# Altium PCB BlackBox-LORA.PcbDoc
Units mil, origin at the board's own origin, x right, y up, seen from the top; angles counter-clockwise.
Board outline 4245 x 1870 mil, 2 copper layers (Top Layer, Bottom Layer); 6 components, 16 nets, 106 pads, 4 vias.
Unrouted connection lines stored in the file: 5.
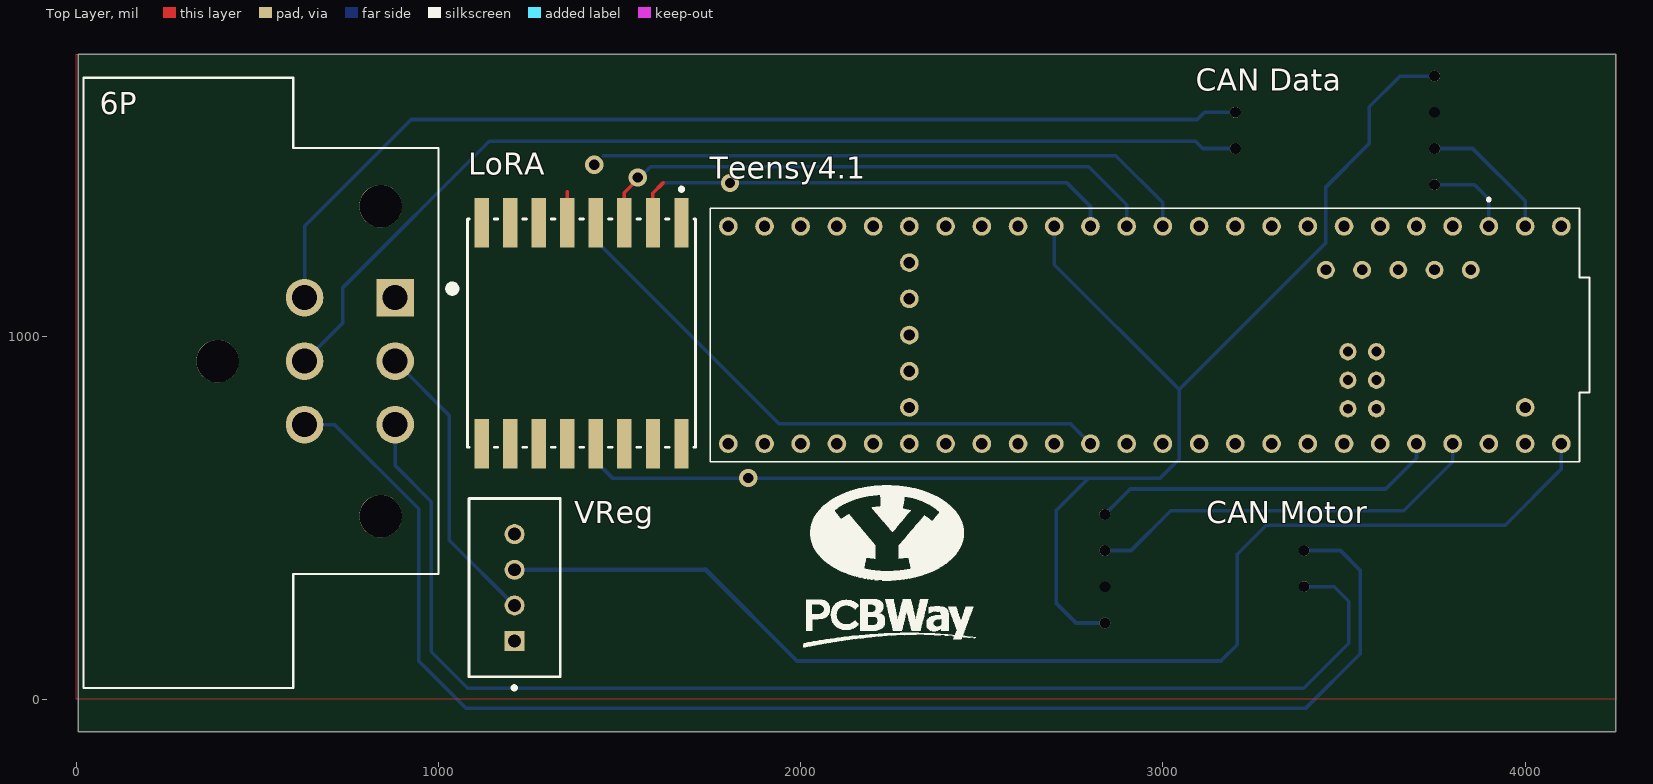
[diagram p0: Top Layer view]
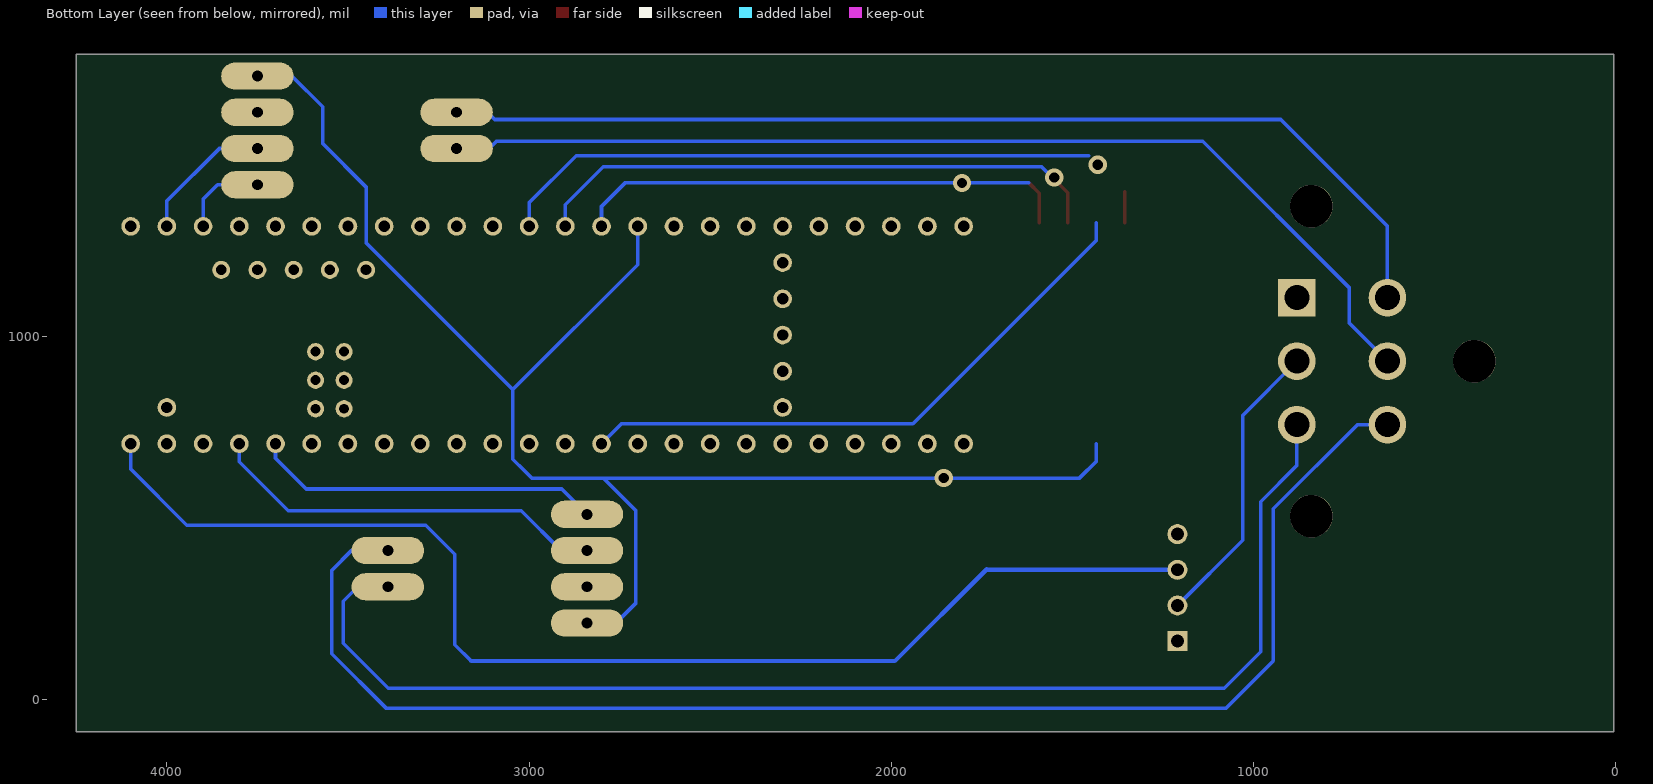
[diagram p1: Bottom Layer view, seen from below]
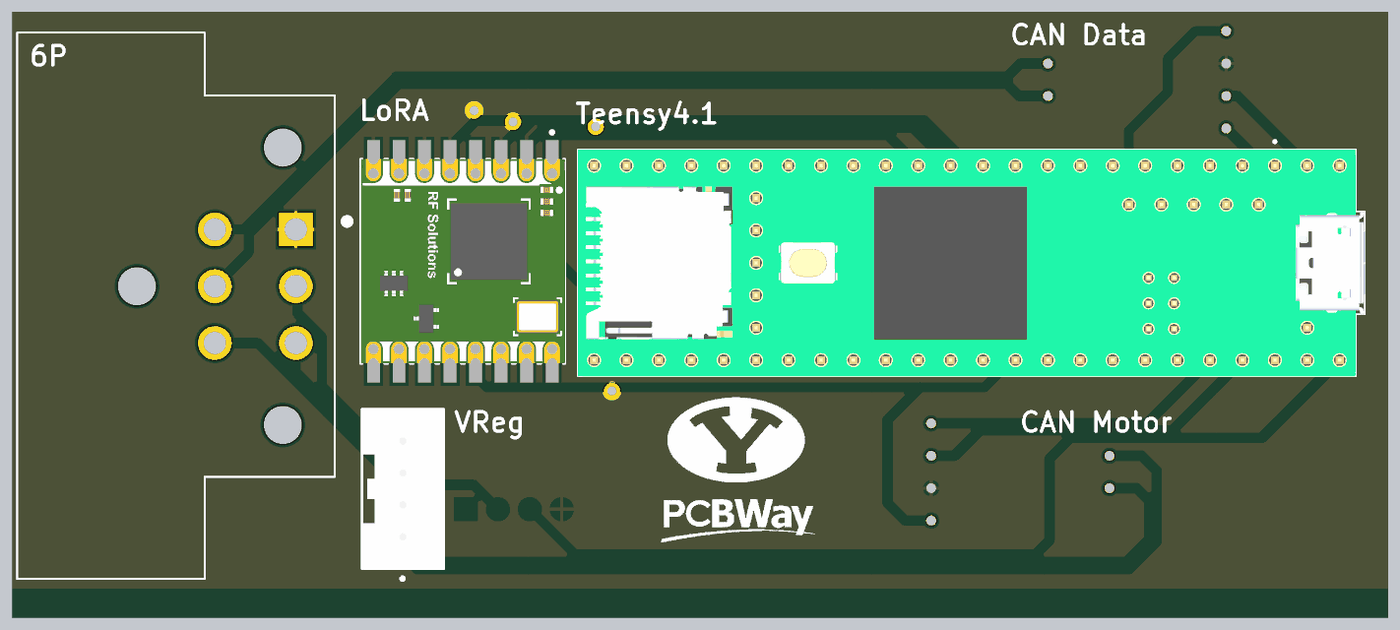
[diagram p2: 3D render of the assembled board from above, using the file's embedded part models]

## Layer stack, top to bottom
Top Solder: solder mask 0.4, Solder Resist, Dk 3.5
Top Layer: signal copper 1.4
Dielectric 1: dielectric 12.6, FR-4, Dk 4.8
Bottom Layer: signal copper 1.4
Bottom Solder: solder mask 0.4, Solder Resist, Dk 3.5

## Board outline
5,-90 4250,-90 4250,1780 5,1780

## Design rules (kind name [scope] priority, off if disabled: settings)
Clearance [All] p1: gap=10 ignorepadtopadclearanceinfootprint=FALSE
HoleSize [All] p1: absolutevalues=TRUE maxlimit=200 minlimit=1 maxpercent=80.000 minpercent=20.000
PolygonConnect [All] p1: connectstyle=Relief reliefconductorwidth=10 reliefentries=4 polygonreliefangle="90 Angle" airgapwidth=10
RoutingVias [All] p1: holewidth=28 width=50 viastyle="Through Hole" minholewidth=28 minwidth=50 maxholewidth=28 maxwidth=50
SolderMaskExpansion [All] p1: expansion=4 istentingtop=FALSE
SupplyNets "Schematic Supply Nets" [InNet('GND')] p1: voltage=0.000
Width [All] p1: maxlimit=20 minlimit=10 preferedwidth=12 minimp=50.000000 maximp=50.000000 favimp=50.000000
29 further rules are at their usual default settings.

## Components (designator, comment, footprint, x,y, rotation, side; value= is the part's Value field where it differs from the comment)
6P "DT13-6P" TE_DT13-6P 630.16,932.95 r0 top
"CAN Data" "CAN Module" "CAN Module-Footprint-1" 3750,1720 r180 top
"CAN Motor" "CAN Module" "CAN Module-Footprint-1" 2840,210 r0 top
LoRA "RFM95W-868S2" FP-RFM95W-868S2-MFG 1395,1010 r270 top
Teensy4.1 "DEV-16771" MODULE_DEV-16771 2950,1005 r180 top
VReg "B04B-XASK-1(LF)(SN)" FP-B04B-XASK-1_LF_SN-MFG 1210,307.64 r270 top

## Footprints (in the part's own frame and the unit in brackets; to place one, negate y for a bottom-side part, rotate by r counter-clockwise, add the part's x,y. Pads: shape width x height; smd on the part's side, far side on the other; paste and mask are expansions set on the pad)
"CAN Module-Footprint-1" [mil]
  round 30 / inner round 60 / far side oval 200x75 hole 30: 1(0,300) 2(0,200) 4(0,0) 5(550,200) 6(550,100)
  round 0 / inner round 60 / far side oval 200x75 hole 30: 3(0,100)
FP-B04B-XASK-1_LF_SN-MFG [mm]
  rect 1.4x1.4 hole 0.9 paste-2539.97 mask+0: 1(3.75,0)
  round 1.4 hole 0.9 paste-2539.97 mask+0: 2(1.25,0) 3(-1.25,0) 4(-3.75,0)
  silkscreen extent -6.25,-3.2 7.15,3.2, body extent -6.35,-3.3 6.35,3.3, height 0.25
FP-RFM95W-868S2-MFG [mm]
  rect 3.5x1 smd paste+0 mask+0: 1(-7.75,7) 2(-7.75,5) 3(-7.75,3) 4(-7.75,1) 5(-7.75,-1) 6(-7.75,-3) 7(-7.75,-5) 8(-7.75,-7) 9(7.75,-7) 10(7.75,-5) 11(7.75,-3) 12(7.75,-1) 13(7.75,1) 14(7.75,3) 15(7.75,5) 16(7.75,7)
  silkscreen extent -10.22,-8 8,8, body extent -9.6,-8.1 9.6,8.1, height 0.25
MODULE_DEV-16771 [mm]
  round 1.308 hole 0.8: 0(-26.67,-7.62) 1(-24.13,-7.62) 2(-21.59,-7.62) 3(-19.05,-7.62) 3.3V_1(6.35,-7.62) 3.3V_2(-24.13,7.62) 3.3V_3(16.51,-2.54) 4(-16.51,-7.62) 5(-13.97,-7.62) 6(-11.43,-7.62) 7(-8.89,-7.62) 8(-6.35,-7.62) 9(-3.81,-7.62) 10(-1.27,-7.62) 11(1.27,-7.62) 12(3.81,-7.62) 13(3.81,7.62) 14(1.27,7.62) 15(-1.27,7.62) 16(-3.81,7.62) 17(-6.35,7.62) 18(-8.89,7.62) 19(-11.43,7.62) 20(-13.97,7.62) 21(-16.51,7.62) 22(-19.05,7.62) 23(-21.59,7.62) 24(8.89,-7.62) 25(11.43,-7.62) 26(13.97,-7.62) 27(16.51,-7.62) 28(19.05,-7.62) 29(21.59,-7.62) 30(24.13,-7.62) 31(26.67,-7.62) 32(29.21,-7.62) 33(29.21,7.62) 34(26.67,7.62) 35(24.13,7.62) 36(21.59,7.62) 37(19.05,7.62) 38(16.51,7.62) 39(13.97,7.62) 40(11.43,7.62) 41(8.89,7.62) GND1(-29.21,-7.62) GND2(6.35,7.62) GND3(-26.67,7.62) GND4(16.51,0) ON/OFF(16.51,5.08) PROGRAM(16.51,2.54) VBAT(16.51,-5.08) VIN(-29.21,7.62) VUSB(-26.67,5.08)
  round 1.258 hole 0.75: 5V(-22.86,-4.57) D+(-17.78,-4.57) D-(-20.32,-4.57) USB_GND1(-15.24,-4.57) USB_GND2(-12.7,-4.57)
  round 1.208 hole 0.7: GND5(-14.24,3.17) LED(-16.24,3.17) R+(-16.24,5.17) R-(-14.24,5.17) T+(-14.24,1.17) T-(-16.24,1.17)
  silkscreen extent -31.18,-9.6 30.48,8.89, body extent -31.18,-8.89 30.48,8.89, height 7.15
TE_DT13-6P [mm]
  rect 2.64x2.64 hole 1.76: 1(6.35,4.45)
  round 2.64 hole 1.76: 2(6.35,0) 3(6.35,-4.45) 4(0,-4.45) 5(0,0) 6(0,4.45)
  round 2.99 hole 2.99 unplated: ""(-6.1,0) ""(5.33,-10.87) ""(5.33,10.87)
  silkscreen extent -15.5,-22.93 10.61,19.87

## Part data
6P: "DT13 Series, 4.44mm Pitch 6 Way 2 Row Right Angle PCB Header, Solder Termination", Package=None, Availability=Unavailable, DigiKey-Purchase-URL=https://snapeda.com/shop?store=DigiKey&id=1897474, EU_RoHS_Compliance=Compliant, MF="TE Connectivity", MP=DT13-6P, Price=None, SnapEDA_Link=https://www.snapeda.com/parts/DT13-6P/TE%20Connectivity%20Deutsch%20Connectors/view-part/1897474/?ref=snap
"CAN Data" "CAN Motor": library part CMP-00030-00003-1, "CAN waveshare"
LoRA: library part CMP-204316-000001-1, "RX TXRX MODULE ISM < 1GHZ SMD", Case/Package=SMD/SMT, Current - Receiving=12.1mA, Current - Transmitting=120mA, Frequency=868MHz, Max Operating Temperature=70°C, Min Operating Temperature=-20°C, Data Rate=300Kbps, Interface=SPI, Mount="Surface Mount", Packaging=Bulk, Sensitivity=-123dBm
Teensy4.1: "RT1062 Teensy 4.1 series ARM® Cortex®-M7 MPU Embedded Evaluation Board", Package=None, Check_prices=https://www.snapeda.com/parts/DEV-16771/SparkFun+Electronics/view-part/?ref=eda, MF="SparkFun Electronics", MP=DEV-16771, SnapEDA_Link=https://www.snapeda.com/parts/DEV-16771/SparkFun+Electronics/view-part/?ref=snap
VReg: library part CMP-17439-000018-1, "CONN HEADER VERT 4POS 2.5MM", Current Rating=3A, Manufacturer=JST, Temperature="-25°C to +85°C", Temperature Range High=+85°C, Temperature Range Low=-25°C, Voltage Rating=250V, Automotive=No, Category=Conn, ComponentLink2Description=Datasheet, ComponentLink2URL=http://www.jst-mfg.com/product/pdf/eng/eXA1.pdf, Conn Gender=Male, Conn Orientation=Straight, Contact Material=Tin,Copper, Device Class L1=Connectors, Device Class L2="Headers and Wire Housings", Device Class L3=unset, Digikey Description="CONN HEADER VERT 4POS 2.5MM", Height=8.8mm, Lead Free=Yes, Manufacturer Part Number=B04B-XASK-1(LF)(SN), Number of Contacts=4, Number of Rows=1, Octopart=https://octopart.com/b04b-xask-1%28lf%29%28sn%29-jst-3990149, Package=B04B-XASK-1(LF)(SN), Pitch=2.5mm, RoHS=TRUE

## Via types
v1: diameter 50, hole 28, Top Layer to Bottom Layer, 4 vias

## Nets (pads, with @x,y where several pads share a name; then routed paths per layer and width w, separated by ;. In a path a pad name is that pad's centre, name@x,y a point inside that pad or via, vN(x,y) a via of type N, cw(c..) or ccw(c..) an arc to the next point about the centre after c; other vN are vias at no path point)
3VCC: "CAN Data.4" "CAN Motor.4" LoRA.13 Teensy4.1.3.3V_1 | length 4238.9
  Bottom Layer w10: 1434.37,704.88 1434.37,655.67 1480.04,610 2795,610 ; Teensy4.1.3.3V_1 2700,1199.36 3044.68,854.68 ; 2840,210 2760,210 2705,265 2705,520 2795,610 ; 3750,1720 3655,1720 3570,1635 3570,1533.81 3450,1413.81 3450,1260 3044.68,854.68 ; 2795,610 2992.63,610 3013.61,630.98 3044.68,662.05 3044.68,854.68
  other v1: 1855,610
GND: 6P.1 "CAN Data.3" "CAN Motor.3" LoRA.6 LoRA.8 Teensy4.1.GND1 VReg.4
Net6P_2: 6P.2 VReg.2 | length 811.2
  Bottom Layer w10: 6P.2 1030,783.11 1030,438.43 VReg.2
Net6P_3: 6P.3 "CAN Motor.6" | length 3550.2
  Bottom Layer w10: 6P.3 880.16,644.84 980,545 980,130.3 1080.3,30 3388.89,30 3513,154.11 3513,270 3473,310 3390,310
Net6P_4: 6P.4 "CAN Motor.5" | length 3954.8
  Bottom Layer w10: 6P.4 712.24,757.76 945,525 945,105.3 1075.3,-25 3395,-25 3545,125 3545,355 3490,410 3390,410
Net6P_5: 6P.5 "CAN Data.5" | length 2886.5
  Bottom Layer w10: 6P.5 735.05,1037.85 735.05,1135.05 1140,1540 3090,1540 3110,1520 3200,1520
Net6P_6: 6P.6 "CAN Data.6" | length 2897.3
  Bottom Layer w10: 6P.6 630.16,1305.16 925,1600 3095,1600 3115,1620 3200,1620
"NetCAN Data_1": "CAN Data.1" Teensy4.1.1 | length 241.6
  Bottom Layer w10: 3750,1420 3860,1420 3900,1380 Teensy4.1.1
"NetCAN Data_2": "CAN Data.2" Teensy4.1.0 | length 380.1
  Bottom Layer w10: 3750,1520 3855,1520 4000,1375 Teensy4.1.0
"NetCAN Motor_1": "CAN Motor.1" Teensy4.1.22 | length 964.2
  Bottom Layer w10: 2840,510 2910,580 3615,580 3700,665 Teensy4.1.22
"NetCAN Motor_2": "CAN Motor.2" Teensy4.1.23 | length 1111.5
  Bottom Layer w10: 2840,410 2912,410 3022,520 3665,520 3800,655 Teensy4.1.23
NetLoRA_2: LoRA.2 Teensy4.1.12 | length 1383.5
  Top Layer w10: LoRA.2 1591.85,1396.85 1620,1425
  Bottom Layer w10: 1620,1425 2735,1425 2800,1360 Teensy4.1.12
  other v1: 1805,1425
NetLoRA_3: LoRA.3 Teensy4.1.11 | length 1603.2
  Top Layer w10: LoRA.3 1513.11,1398.11 v1@1552.5,1437.5
  Bottom Layer w10: v1@1552.5,1437.5 1585,1470 2795,1470 2900,1365 Teensy4.1.11
  other v1: 1550,1440
NetLoRA_4: LoRA.4 Teensy4.1.13 | length 1647.2
  Bottom Layer w10: 1434.37,1315.12 1434.37,1265.91 1940.28,760 2745,760 Teensy4.1.13
NetLoRA_5: LoRA.5 Teensy4.1.10 | length 1749.4
  Top Layer w10: LoRA.5 1355.63,1400.63
  Bottom Layer w10: 1455,1500 2870,1500 3000,1370 Teensy4.1.10
  other v1: 1430,1475
NetTeensy4.1_VIN: Teensy4.1.VIN VReg.3 | length 3431.6
  Bottom Layer w10: 3160,105 3205,150 3205,400 3285,480 3945,480 4100,635 Teensy4.1.VIN
  Bottom Layer w12: VReg.3 1735,356.85 1736.57,358.43 1990,105 3160,105
pads on no net: 6P. LoRA.1 LoRA.7 LoRA.9 LoRA.10 LoRA.11 LoRA.12 LoRA.14 LoRA.15 LoRA.16 Teensy4.1.2 Teensy4.1.3 Teensy4.1.3.3V_2 Teensy4.1.3.3V_3 Teensy4.1.4 Teensy4.1.5 Teensy4.1.5V Teensy4.1.6 Teensy4.1.7 Teensy4.1.8 Teensy4.1.9 Teensy4.1.14 Teensy4.1.15 Teensy4.1.16 Teensy4.1.17 Teensy4.1.18 Teensy4.1.19 Teensy4.1.20 Teensy4.1.21 Teensy4.1.24 Teensy4.1.25 Teensy4.1.26 Teensy4.1.27 Teensy4.1.28 Teensy4.1.29 Teensy4.1.30 Teensy4.1.31 Teensy4.1.32 Teensy4.1.33 Teensy4.1.34 Teensy4.1.35 Teensy4.1.36 Teensy4.1.37 Teensy4.1.38 Teensy4.1.39 Teensy4.1.40 Teensy4.1.41 Teensy4.1.D+ Teensy4.1.D- Teensy4.1.GND2 Teensy4.1.GND3 Teensy4.1.GND4 Teensy4.1.GND5 Teensy4.1.LED Teensy4.1.ON/OFF Teensy4.1.PROGRAM Teensy4.1.R+ Teensy4.1.R- Teensy4.1.T+ Teensy4.1.T- Teensy4.1.USB_GND1 Teensy4.1.USB_GND2 Teensy4.1.VBAT Teensy4.1.VUSB VReg.1

## Polygon pours and split planes (outlines as drawn)
GND on Top Layer "NONET_L01_P000" (solid, shelved, pour order 0): 0,1780 4250,1780 4250,0 0,0

## Silkscreen, mask and mechanical layers (free items; w line width, h text height)
Top Overlay:
  drawing of 7 lines, arcs and shapes, not listed

## Text inside footprints (layer, text, board x,y; h text height)
Teensy4.1: Mechanical 13 "Teensy 4.1" at 2959.84,991.61 h50 r180